# Altium PCB 6502.PcbDoc
Units mil, origin at the board's own origin, x right, y up, seen from the top; angles counter-clockwise.
Board outline 6000 x 4000 mil, 2 copper layers (Top Layer, Bottom Layer); 34 components, 103 nets, 376 pads, 10 vias.
Unrouted connection lines stored in the file: 1.
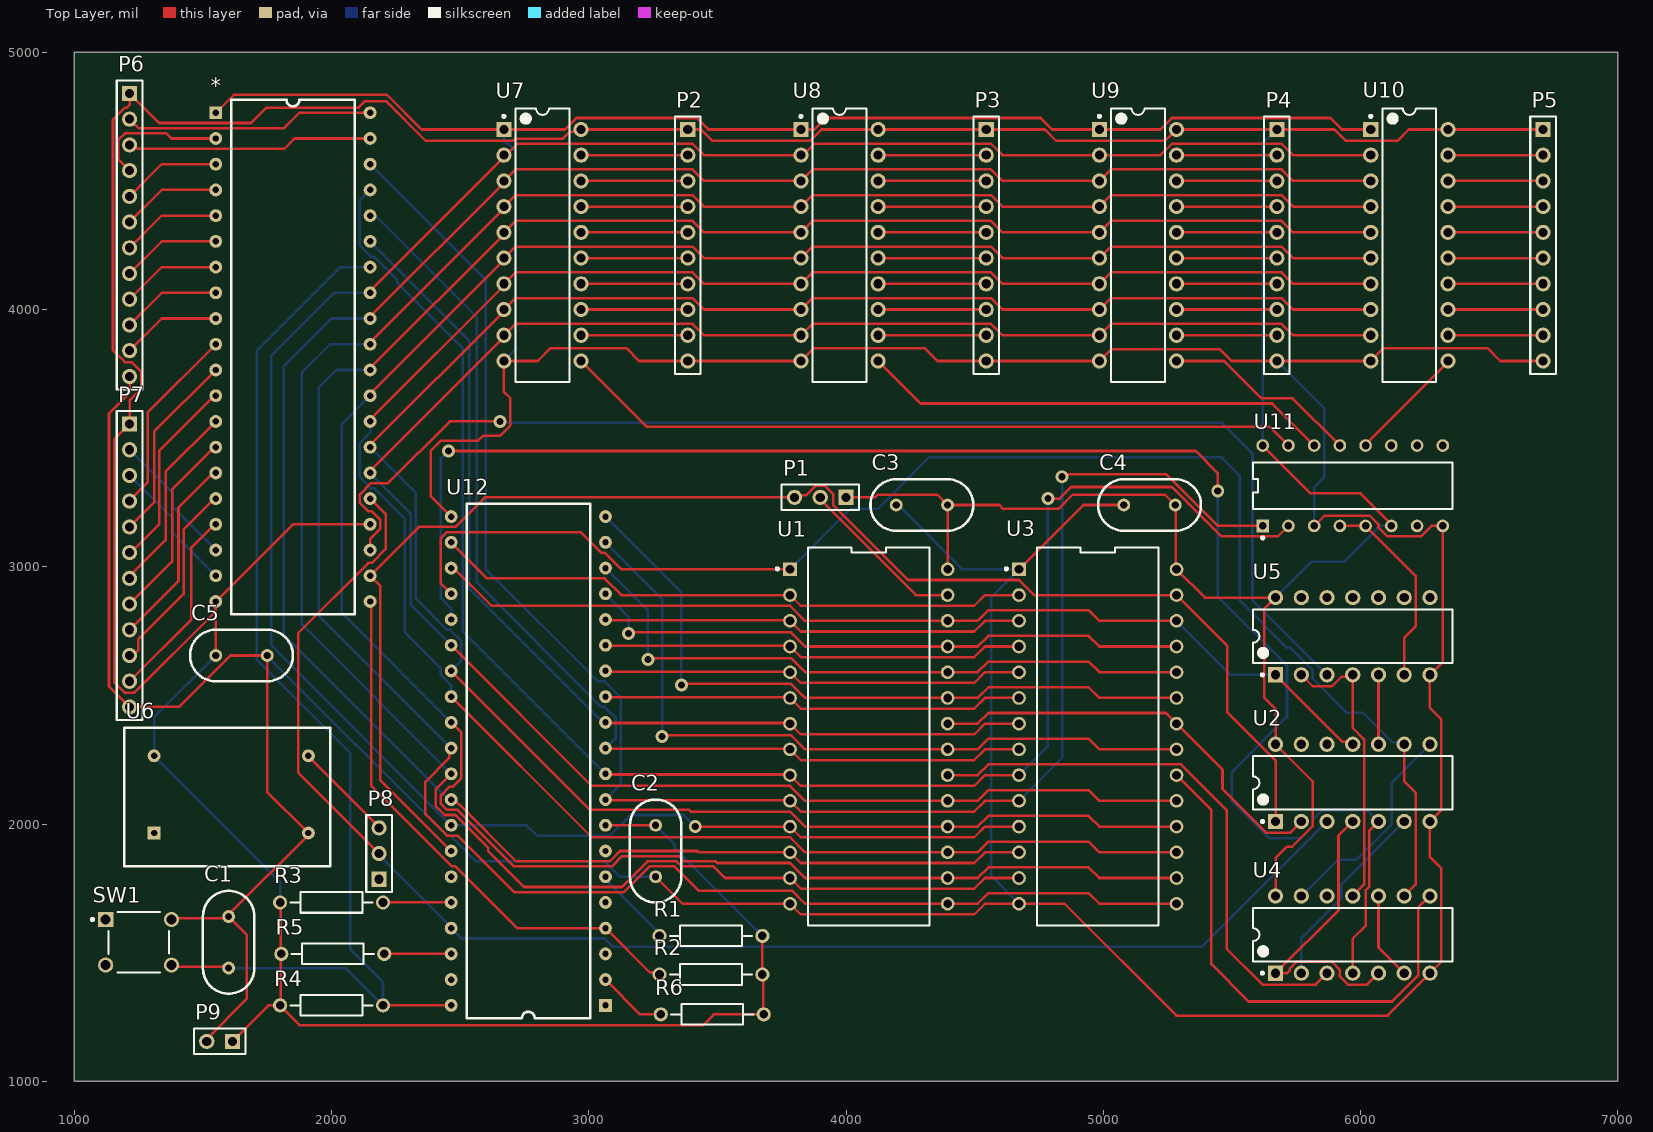
[diagram p0: Top Layer view]
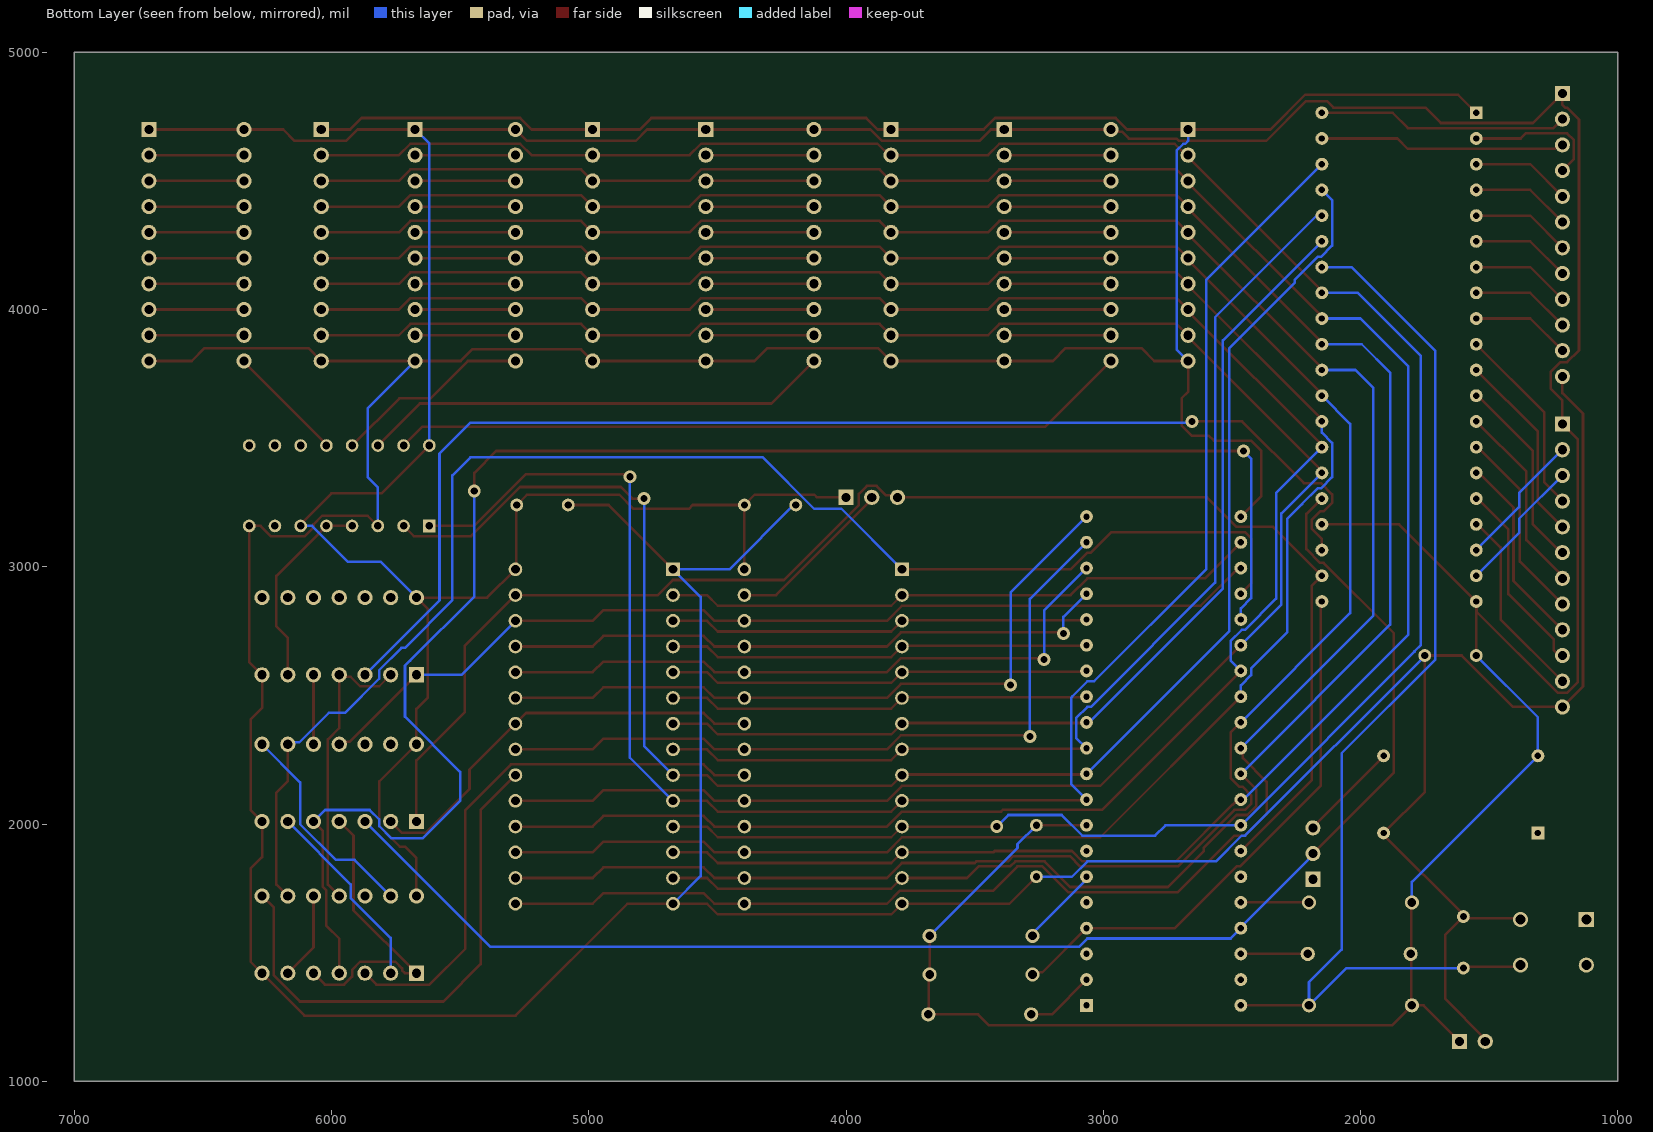
[diagram p1: Bottom Layer view, seen from below]

## Layer stack, top to bottom
Top Solder: solder mask 0.4, Solder Resist, Dk 3.5
Top Layer: signal copper 1.4
Dielectric 1: dielectric 12.6, FR-4, Dk 4.8
Bottom Layer: signal copper 1.4
Bottom Solder: solder mask 0.4, Solder Resist, Dk 3.5

## Board outline
1000,1000 7000,1000 7000,5000 1000,5000

## Design rules (kind name [scope] priority, off if disabled: settings)
Clearance [All] p1: gap=10 ignorepadtopadclearanceinfootprint=FALSE except(0: Arc-Hole Track-Hole SMDPad-Hole THPad-Hole Via-Hole Fill-Hole Poly-Hole Region-Hole Text-Hole)
PolygonConnect [All] p1: connectstyle=Relief reliefconductorwidth=10 reliefentries=4 polygonreliefangle="90 Angle" airgapwidth=10
RoutingVias [All] p1: holewidth=28 width=50 viastyle="Through Hole" minholewidth=28 minwidth=50 maxholewidth=28 maxwidth=50
SolderMaskExpansion [All] p1: expansion=4 istentingtop=FALSE
Width [All] p1: maxlimit=10 minlimit=10 preferedwidth=10
30 further rules are at their usual default settings.

## Classes and differential pairs
component class PIO: * C5 P2 P3 P4 P5 P6 P7 U7 U8 U9 U10 U11
component class BusSelect: U2 U4 U5
component class Main: C1 C2 C3 C4 P1 P8 P9 R1 R2 R3 R4 R5 R6 SW1 U1 U3 U6 U12

## Components (designator, comment, footprint, x,y, rotation, side; value= is the part's Value field where it differs from the comment)
* "W65C22" DIP40 1550,4765 r0 top
C1 "Cap" "Ceramic Capacitor" 1600,1440 r90 top value=100nF
C2 "Cap" "Ceramic Capacitor" 3260,1995 r270 top value=100nF
C3 "Cap" "Ceramic Capacitor" 4395,3240 r180 top value=100nF
C4 "Cap" "Ceramic Capacitor" 5280,3240 r180 top value=100nF
C5 "Cap" "Ceramic Capacitor" 1550,2655 r0 top value=100nF
P1 "Header 3" HDR1X3 4000,3270 r180 top
P2 "Header 10" HDR1X10 3385,4700 r270 top
P3 "Header 10" HDR1X10 4545,4700 r270 top
P4 "Header 10" HDR1X10 5675,4700 r270 top
P5 "Header 10" HDR1X10 6710,4700 r270 top
P6 "Header 12" HDR1X12 1215,4840 r270 top
P7 "Header 12" HDR1X12 1215,3555 r270 top
P8 "Header 3" HDR1X3 2185,1785 r90 top
P9 "Header 2" HDR1X2 1615,1155 r180 top
R1 "Res2" AXIAL-0.4 3475,1565 r0 top value=10K
R2 "Res2" AXIAL-0.4 3475,1415 r0 top value=10K
R3 "Res2" AXIAL-0.4 2000,1695 r180 top value=10K
R4 "Res2" AXIAL-0.4 2000,1295 r180 top value=10K
R5 "Res2" AXIAL-0.4 2005,1495 r180 top value=10K
R6 "Res2" AXIAL-0.4 3480,1260 r0 top value=10K
SW1 "1825910-6" TECO-1825910-6_V 1250,1540 r0 top
U1 "AT28C256-15PU" FP-28P6-MFG 4088.75,2340 r0 top
U2 "SN74HC04N" N0014A 5970,2160 r90 top
U3 "hm62256b" FP-28P6-MFG 4978.75,2340 r0 top
U4 "SN74HC32N" N0014A 5970,1570 r90 top
U5 "SN74HC32N" N0014A 5970,2730 r90 top
U6 "Quartz" Quartz 1310,1965 r90 top
U7 "CD74HC573E" N0020A 2820,4250 r0 top
U8 "CD74HC573E" N0020A 3975,4250 r0 top
U9 "CD74HC573E" N0020A 5135,4250 r0 top
U10 "CD74HC573E" N0020A 6190,4250 r0 top
U11 "CD74HC238E" FP-N0016A-MFG 5970,3315 r90 top
U12 "W65C02" DIP40 3065,1295 r180 top

## Footprints (in the part's own frame and the unit in brackets; to place one, negate y for a bottom-side part, rotate by r counter-clockwise, add the part's x,y. Pads: shape width x height; smd on the part's side, far side on the other; paste and mask are expansions set on the pad)
AXIAL-0.4 [mm] "Axial Device, Thru-Hole; 2 Leads; 0.4 in Pin Spacing"
  round 1.4 hole 0.85: 1(-5.08,0) 2(5.08,0)
  silkscreen extent -4.06,-1.02 4.06,1.02
"Ceramic Capacitor" [mil]
  round 50 hole 28: 1(0,0) 2(200,0)
  silkscreen extent -100,-100 300,100
DIP40 [mil]
  rect 50x50 hole 25: 1(0,0)
  round 50 hole 25: 2(0,-100) 3(0,-200) 4(0,-300) 5(0,-400) 6(0,-500) 7(0,-600) 8(0,-700) 9(0,-800) 10(0,-900) 11(0,-1000) 12(0,-1100) 13(0,-1200) 14(0,-1300) 15(0,-1400) 16(0,-1500) 17(0,-1600) 18(0,-1700) 19(0,-1800) 20(0,-1900) 21(600,-1900) 22(600,-1800) 23(600,-1700) 24(600,-1600) 25(600,-1500) 26(600,-1400) 27(600,-1300) 28(600,-1200) 29(600,-1100) 30(600,-1000) 31(600,-900) 32(600,-800) 33(600,-700) 34(600,-600) 35(600,-500) 36(600,-400) 37(600,-300) 38(600,-200) 39(600,-100) 40(600,0)
  silkscreen extent 60,-1950 540,50
FP-28P6-MFG [mm]
  rect 1.35x1.35 hole 0.85 paste-1000 mask+0: 1(-7.779,16.51)
  round 1.35 hole 0.85 paste-1000 mask+0: 2(-7.779,13.97) 3(-7.779,11.43) 4(-7.779,8.89) 5(-7.779,6.35) 6(-7.779,3.81) 7(-7.779,1.27) 8(-7.779,-1.27) 9(-7.779,-3.81) 10(-7.779,-6.35) 11(-7.779,-8.89) 12(-7.779,-11.43) 13(-7.779,-13.97) 14(-7.779,-16.51) 15(7.779,-16.51) 16(7.779,-13.97) 17(7.779,-11.43) 18(7.779,-8.89) 19(7.779,-6.35) 20(7.779,-3.81) 21(7.779,-1.27) 22(7.779,1.27) 23(7.779,3.81) 24(7.779,6.35) 25(7.779,8.89) 26(7.779,11.43) 27(7.779,13.97) 28(7.779,16.51)
  silkscreen extent -9.15,-18.67 5.98,18.67, body extent -8.55,-18.89 8.55,18.89, height 0.25
FP-N0016A-MFG [mm]
  rect 1.25x1.25 hole 0.75 paste-1000 mask+0: 1(-3.97,8.89)
  round 1.25 hole 0.75 paste-1000 mask+0: 2(-3.97,6.35) 3(-3.97,3.81) 4(-3.97,1.27) 5(-3.97,-1.27) 6(-3.97,-3.81) 7(-3.97,-6.35) 8(-3.97,-8.89) 9(3.97,-8.89) 10(3.97,-6.35) 11(3.97,-3.81) 12(3.97,-1.27) 13(3.97,1.27) 14(3.97,3.81) 15(3.97,6.35) 16(3.97,8.89)
  silkscreen extent -5.27,-9.84 2.3,9.84, body extent -4.69,-9.94 4.69,9.94, height 0.25
HDR1X2 [mm] "Connector; Header; 2 Position"
  rect 1.5x1.5 hole 0.9: 1(0,0)
  round 1.5 hole 0.9: 2(2.54,0)
  silkscreen extent -1.27,-1.27 3.81,1.27
HDR1X3 [mm] "Connector; Header; 3 Position"
  rect 1.5x1.5 hole 0.9: 1(0,0)
  round 1.5 hole 0.9: 2(2.54,0) 3(5.08,0)
  silkscreen extent -1.27,-1.27 6.35,1.27
HDR1X10 [mm] "Connector; Header; 10 Position"
  rect 1.5x1.5 hole 0.9: 1(0,0)
  round 1.5 hole 0.9: 2(2.54,0) 3(5.08,0) 4(7.62,0) 5(10.16,0) 6(12.7,0) 7(15.24,0) 8(17.78,0) 9(20.32,0) 10(22.86,0)
  silkscreen extent -1.27,-1.27 24.13,1.27
HDR1X12 [mm] "Connector; Header; 12 Position"
  rect 1.5x1.5 hole 0.9: 1(0,0)
  round 1.5 hole 0.9: 2(2.54,0) 3(5.08,0) 4(7.62,0) 5(10.16,0) 6(12.7,0) 7(15.24,0) 8(17.78,0) 9(20.32,0) 10(22.86,0) 11(25.4,0) 12(27.94,0)
  silkscreen extent -1.27,-1.27 29.21,1.27
N0014A [mm] "DIP, 14-Leads, Body 19.7x6.6mm, Pitch 2.54mm"
  rect 1.5x1.5 hole 0.9: 1(-3.81,7.62)
  round 1.5 hole 0.9: 2(-3.81,5.08) 3(-3.81,2.54) 4(-3.81,0) 5(-3.81,-2.54) 6(-3.81,-5.08) 7(-3.81,-7.62) 8(3.81,-7.62) 9(3.81,-5.08) 10(3.81,-2.54) 11(3.81,0) 12(3.81,2.54) 13(3.81,5.08) 14(3.81,7.62)
  silkscreen extent -3.93,-9.85 2.65,9.85, body extent -3.95,-9.85 3.95,9.85, height 5.08
N0020A [mm] "DIP, 20-Leads, Body 26.9x6.6mm, Pitch 2.54mm"
  rect 1.5x1.5 hole 0.9: 1(-3.81,11.43)
  round 1.5 hole 0.9: 2(-3.81,8.89) 3(-3.81,6.35) 4(-3.81,3.81) 5(-3.81,1.27) 6(-3.81,-1.27) 7(-3.81,-3.81) 8(-3.81,-6.35) 9(-3.81,-8.89) 10(-3.81,-11.43) 11(3.81,-11.43) 12(3.81,-8.89) 13(3.81,-6.35) 14(3.81,-3.81) 15(3.81,-1.27) 16(3.81,1.27) 17(3.81,3.81) 18(3.81,6.35) 19(3.81,8.89) 20(3.81,11.43)
  silkscreen extent -3.93,-13.5 2.65,13.5, body extent -3.95,-13.45 3.95,13.45, height 5.08
Quartz [mil]
  rect 50x50 hole 25: 1(0,0)
  round 50 hole 25: 7(0,-600) 8(300,-600) 14(300,0)
  silkscreen extent -130,-685 410,115
TECO-1825910-6_V [mm] "Switch, 4-Leads, Body 5.99x5.99mm"
  rect 1.5x1.5 hole 0.99: 1(-3.25,2.25)
  round 1.5 hole 0.99: 2(3.25,2.25) 3(-3.25,-2.25) 4(3.25,-2.25)
  silkscreen extent -4.67,-2.99 2.99,3, body extent -3,-2.99 2.99,3, height 5

## Part data
C1 C2 C3 C4 C5: "Capacitor", LatestRevisionDate=17-Jul-2002, LatestRevisionNote="Re-released for DXP Platform.", PackageDescription="Radial Cap, Thru-Hole; 2 Leads; 0.3 in Pin Spacing", PackageReference=RAD-0.3, Published=8-Jun-2000, Publisher="Altium Limited"
P1 P8: "Header, 3-Pin", LatestRevisionDate=17-Jul-2002, LatestRevisionNote="Re-released for DXP Platform.", Publisher="Altium Limited"
P2 P3 P4 P5: "Header, 10-Pin", LatestRevisionDate=17-Jul-2002, LatestRevisionNote="Re-released for DXP Platform.", Publisher="Altium Limited"
P6 P7: "Header, 12-Pin", LatestRevisionDate=17-Jul-2002, LatestRevisionNote="Re-released for DXP Platform.", Publisher="Altium Limited"
P9: "Header, 2-Pin", LatestRevisionDate=17-Jul-2002, LatestRevisionNote="Re-released for DXP Platform.", Publisher="Altium Limited"
R1 R2 R3 R4 R5 R6: "Resistor", LatestRevisionDate=17-Jul-2002, LatestRevisionNote="Re-released for DXP Platform.", PackageDescription="Axial Device, Thru-Hole; 2 Leads; 0.4 in Pin Spacing", PackageReference=AXIAL-0.4, Published=8-Jun-2000, Publisher="Altium Limited"
SW1: library part CMP-1684-00021-1, "Tact Switch, SPST-NO, 0.05 A, -35 to 85 degC, 4-Pin THD, RoHS, Bulk", Actuator Color=Black, Contact Rating @ Voltage=0.05A@24VDC, Dielectric Strength=500VAC, Manufacturer="TE Connectivity", Maximum AC Voltage Rating=N/A, Maximum Contact Resistance=100mOhm, Maximum DC Voltage Rating=24V, Minimum Insulation Resistance=100MOhm, Operating Temperature=-35to85C, Package Description="4-Pin Through Hole Device, Body 5.99 x 5.99 mm, Pitch 6.5 mm", Package Reference=THD, Actuator Length=1.4mm, Actuator Material=PolybutyleneTerephthalate, Actuator Style=RoundButton, Base Material=N/A, Body Orientation=Straight, Bushing Type=Unthreaded, Contact Material=CopperAlloy, Contact Plating=Silver, Datasheet URL=http://www.te.com/commerce/DocumentDelivery/DDEController?Action=showdoc&DocId=Customer+Drawing%7F1825910%7FC9%7Fpdf%7FEnglish%7FENG_CD_1825910_C9.pdf%7F1825910-6, Datasheet Version="Rev. C9", Dimension=5.99x5mm, Electrical Life=100000Cycles, Family=1825910, Function=MomentaryContact, Housing Material=N/A, Illumination=N/R, Manufacturer URL=http://www.te.com, Mechanical Life=100000Cycles, Mounting=ThroughHole, Packaging=N/A, Part No=1825910-6, Pole Throw Configuration=SPST, Product Weight=N/A, RoHS=Yes, Seal Description=N/A, Seal Location=N/A, Switch Configuration=OFF(ON), Terminal Type=PCPins, Thread Size=N/R
U1: library part CMP-06313-000003-1, "IC EEPROM 256K PARALLEL 28DIP", Manufacturer=Microchip, Max Supply Voltage=5.5V, Min Supply Voltage=4.5V, Nominal Supply Current=50mA, Package=28P6, Temperature="-40°C to +85°C", Temperature Range High=+85°C, Temperature Range Low=-40°C, Access Time=150ns, Automotive=No, Category=IC, ComponentLink2Description=Datasheet, ComponentLink2URL=http://ww1.microchip.com/downloads/en/DeviceDoc/doc0006.pdf, Device Class L1="Integrated Circuits (ICs)", Device Class L2=Memory, Device Class L3=EEPROM, Digikey Description="IC EEPROM 256K PARALLEL 28DIP", Height=4.826mm, Interface=Parallel, Ipc Land Pattern Name=DIP1556W46P254L3734H483Q28, Lead Free=Yes, Manufacturer Part Number=AT28C256-15PU, Memory Size=256Kbits, Memory Type=EEPROM, Octopart=https://octopart.com/at28c256-15pu-microchip-77758240, RoHS=TRUE, Standoff Height=0.381mm
U2: library part CMP-1615-00892-2, "Hex Inverters, N0014A, TUBE", F @ Nom Voltage(Max)(Mhz)=20, Generic Part Number=SN74HC04, ICC @ Nom Voltage(Max)(mA)=0.02, Manufacturer="Texas Instruments", Operating Temperature Range(C)="-40 to 85", Rating=Catalog, Voltage(Nom)(V)=5, Bits(#)=6, Code_JEDEC=MS-001, DatasheetVersion=SCLS078F, Input Type=CMOS, Output Drive (IOL/IOH)(Max)(mA)=-4/4, Output Type=CMOS, PackageReference=N0014A, Schmitt Trigger=No, Technology Family=HC, tpd @ Nom Voltage(Max)(ns)=20, VCC(Max)(V)=6, VCC(Min)(V)=2
U3: library part CMP-06313-000003-1, "RAM", Manufacturer=Microchip, Manufacturer Part Number=AT28C256-15PU, Max Supply Voltage=5.5V, Min Supply Voltage=4.5V, Nominal Supply Current=50mA, Package=28P6, Temperature="-40°C to +85°C", Temperature Range High=+85°C, Temperature Range Low=-40°C, Access Time=150ns, Automotive=No, Category=IC, ComponentLink2Description=Datasheet, ComponentLink2URL=http://ww1.microchip.com/downloads/en/DeviceDoc/doc0006.pdf, Device Class L1="Integrated Circuits (ICs)", Device Class L2=Memory, Device Class L3=EEPROM, Digikey Description="IC EEPROM 256K PARALLEL 28DIP", Height=4.826mm, Interface=Parallel, Ipc Land Pattern Name=DIP1556W46P254L3734H483Q28, Lead Free=Yes, Memory Size=256Kbits, Memory Type=EEPROM, Octopart=https://octopart.com/at28c256-15pu-microchip-77758240, RoHS=TRUE, Standoff Height=0.381mm
U4 U5: library part CMP-1573-00148-3, "Quadruple 2-Input Positive-OR Gates, N0014A, TUBE", F @ Nom Voltage(Max)(Mhz)=70, Generic Part Number=SN74HC32, ICC @ Nom Voltage(Max)(mA)=0.02, Manufacturer="Texas Instruments", Operating Temperature Range(C)="-40 to 85", Rating=Catalog, tpd @ Nom Voltage(Max)(ns)=25, Voltage(Nom)(V)=5, Bits(#)=4, Code_JEDEC=MS-001, DatasheetVersion=SCLS200D, Input Type=CMOS, Output Drive (IOL/IOH)(Max)(mA)=5.2/-5.2, Output Type=CMOS, PackageReference=N0014A, PackageVersion=http://www.ti.com/lit/ml/mpdi002c/mpdi002c.pdf, VCC(Max)(V)=6, VCC(Min)(V)=2
U7 U8 U9 U10: library part CMP-1621-00360-2, "High Speed CMOS Logic Octal Transparent Latches with 3-State Outputs, N0020A, TUBE", F @ Nom Voltage(Max)(Mhz)=28, Generic Part Number=CD74HC573, ICC @ Nom Voltage(Max)(mA)=0.08, Manufacturer="Texas Instruments", Operating Temperature Range(C)="-55 to 125", Rating=Catalog, tpd @ Nom Voltage(Max)(ns)=37, Voltage(Nom)(V)=6, 3-State Output=Yes, Bits(#)=8, Code_JEDEC=MS-001, DatasheetVersion=SCLS454A, Input Type=CMOS, Output Drive (IOL/IOH)(Max)(mA)=7.8/-7.8, Output Logic=Inverted, Output Type=CMOS, PackageReference=N0020A, Schmitt Trigger=No, Technology Family=HC, VCC(Max)(V)=6, VCC(Min)(V)=2
U11: library part CMP-1633-00674-3, "IC DECODER/DEMUX 1X3:8 16DIP", Case/Package=PDIP, High Level Output Current=-5.2mA, Low Level Output Current=5.2mA, Max Operating Temperature=125°C, Max Supply Voltage=6V, Min Operating Temperature=-55°C, Min Supply Voltage=2V, Package Quantity=25, Quiescent Current=8uA, Bandwidth=28MHz, Contact Plating=Gold, Independent Circuits=1, Lead Free="Lead Free", Logic Function=Demultiplexer, Mount="Through Hole", Number of Bits=8, Number of Channels=1, Number of Elements=1, Number of Input Lines=3, Number of Inputs=3, Number of Output Lines=8, Number of Outputs=8, Number of Pins=16, Packaging=Rail/Tube, Polarity=Non-Inverting, Propagation Delay=13ns, Radiation Hardening=No, REACH SVHC="No SVHC", RoHS Compliant=Yes, Supply Type=Single, Turn-On Delay Time=265ns, Weight=0.03357oz

## Via types
v1: diameter 50, hole 28, Top Layer to Bottom Layer, 10 vias

## Nets (pads, with @x,y where several pads share a name; then routed paths per layer and width w, separated by ;. In a path a pad name is that pad's centre, name@x,y a point inside that pad or via, vN(x,y) a via of type N, cw(c..) or ccw(c..) an arc to the next point about the centre after c; other vN are vias at no path point)
A0: *.38 U1.10 U3.10 U11.1 U12.9 | length 6755.2
  Top Layer w10: U12.9 3067.5,2092.5 3780,2092.5 U1.10 3824.07,2048.43 4498.51,2048.43 4540.09,2090 U3.10 ; v1(4840,3350) 4847.65,3357.65 4863.51,3357.65 4865.86,3360 5244.85,3360 5446.15,3158.7 U11.1
  Bottom Layer w10: *.38 2600,4115 2600,2990 3035,2555 3061.57,2555 3120,2496.57 3120,2495 3125,2490 3125,2155 U12.9 ; U3.10 4840,2257.5 v1(4840,3350)
A1: *.37 U1.9 U3.9 U11.2 U12.10 | length 6504.6
  Top Layer w10: U12.10 3067.5,2192.5 3780,2192.5 U1.9 3824.07,2148.43 4498.51,2148.43 4540.09,2190 U3.9 ; v1(4785,3265) 4830,3265 4875,3310 5266.57,3310 5457.47,3119.09 5680.39,3119.09 U11.2
  Bottom Layer w10: *.37 2110,4425 2110,4248.43 2153.43,4205 2166.57,4205 2255,4116.57 2255,4105 2510,3850 2510,2750 U12.10 ; U3.9 4785,2302.5 v1(4785,3265)
A2: *.36 U1.8 U3.8 U12.11 | length 4145.6
  Top Layer w10: U12.11 3067.5,2292.5 3780,2292.5 U1.8 3824.07,2248.43 4498.51,2248.43 4540.09,2290 U3.8
  Bottom Layer w10: *.36 2170,4365 2565,3970 2565,2938.43 3048.43,2455 3061.57,2455 3105,2411.57 3105,2335 U12.11
A3: *.35 U1.7 U3.7 U12.12 | length 3898.9
  Top Layer w10: U12.12 3067.5,2392.5 3780,2392.5 U1.7 3824.07,2348.43 4498.51,2348.43 4540.09,2390 U3.7
  Bottom Layer w10: *.35 2535,3880 2535,2915 3055,2395 U12.12
A4: U1.6 U3.6 U12.13 | length 1644
  Top Layer w10: U12.13 3067.5,2492.5 3780,2492.5 U1.6 3824.07,2448.43 4498.51,2448.43 4540.09,2490 U3.6
A5: U1.5 U3.5 U12.14 | length 1644
  Top Layer w10: U12.14 3067.5,2592.5 3780,2592.5 U1.5 3824.07,2548.43 4498.51,2548.43 4540.09,2590 U3.5
A6: U1.4 U3.4 U12.15 | length 1644
  Top Layer w10: U12.15 3067.5,2692.5 3780,2692.5 U1.4 3824.07,2648.43 4498.51,2648.43 4540.09,2690 U3.4
A7: U1.3 U3.3 U12.16 | length 1644
  Top Layer w10: U12.16 3067.5,2792.5 3780,2792.5 U1.3 3824.07,2748.43 4498.51,2748.43 4540.09,2790 U3.3
A8: U1.25 U3.25 U12.17 | length 2381.6
  Top Layer w10: v1(3155,2740) 3160,2745 3786.3,2745 3841.3,2690 U1.25 4511.8,2690 4553.38,2731.57 4943.51,2731.57 4985.09,2690 U3.25
  Bottom Layer w10: U12.17 3155,2805 v1(3155,2740)
A9: U1.24 U3.24 U12.18 | length 2537.6
  Top Layer w10: v1(3230,2640) 3235,2645 3786.3,2645 3841.3,2590 U1.24 4511.8,2590 4553.38,2631.57 4943.51,2631.57 4985.09,2590 U3.24
  Bottom Layer w10: U12.18 3230,2830 v1(3230,2640)
A10: U1.21 U3.21 U12.19 | length 2905.4
  Top Layer w10: v1(3285,2340) 3290,2345 3786.3,2345 3841.3,2290 U1.21 4511.8,2290 4553.38,2331.57 4943.51,2331.57 4985.09,2290 U3.21
  Bottom Layer w10: U12.19 3285,2875 v1(3285,2340)
A11: U1.23 U3.23 U12.20 | length 2771.5
  Top Layer w10: v1@3350,2540 v1(3360,2540) 3365,2545 3786.3,2545 3841.3,2490 U1.23 4511.8,2490 4553.38,2531.57 4943.51,2531.57 4985.09,2490 U3.23
  Bottom Layer w10: U12.20 3360,2900 v1(3360,2540)
A12: U1.2 U3.2 U12.22 | length 2326.9
  Top Layer w10: U12.22 2605,2955 3061.57,2955 3126.57,2890 U1.2 3824.07,2848.43 4498.51,2848.43 4540.09,2890 U3.2
A13: U1.26 U2.11 U3.26 U5.1 U12.23 | length 3823.2
  Top Layer w10: U12.23 2475,2995 2621.57,2848.43 3782.87,2848.43 3841.3,2790 U1.26 4511.8,2790 4553.38,2831.57 4943.51,2831.57 4985.09,2790 U3.26 ; U5.1 5930.61,2319.39 5960.61,2319.39 U2.11
  Bottom Layer w10: U3.26 5495,2580 U5.1
A14: U1.1 U2.9 U4.9 U12.24 | length 5620.2
  Top Layer w10: U12.24 2425,2935 2425,3111.57 2448.43,3135 2968.43,3135 3048.43,3055 3061.57,3055 3126.57,2990 U1.1 ; U4.9 6214.53,1764.53 6214.53,2121.88 6170,2166.4 U2.9
  Bottom Layer w10: U1.1 4017.97,3225.47 4123.9,3225.47 4323.43,3425 5460,3425 5530,3355 5530,2870 5715.15,2684.85 5728.12,2684.85 5814.53,2598.44 5814.53,2565.47 5947.81,2432.19 6010.78,2432.19 6125.47,2317.5 6162.5,2317.5 U2.9
A15: U2.5 U4.4 U12.25 | length 6536
  Top Layer w10: v1(2455,3450) 5360,3450 5445,3365 v1(5445,3295) ; U4.4 5970,1554.14 6020,1604.14 6020,1741.72 6034.53,1756.24 6034.53,1974.53 U2.5
  Bottom Layer w10: v1(2455,3450) 2425,3420 2425,2878.43 2465,2838.43 U12.25 ; v1(5445,3295) 5445,2885 5695,2635 5695.27,2635 5714.53,2615.74 5714.53,2417.5 5500,2202.97 5500,2090 5645,1945 5767.97,1945 5814.53,1991.56 5814.53,2017.5 5851.56,2054.53 6025.47,2054.53 U2.5 U2.5@6062.5,2002.5
BE: R3.1 U12.36 | length 265
  Top Layer w10: R3.1 U12.36
C\L\K\: U2.4 U4.1 U4.5 | length 1207.6
  Top Layer w10: U2.4 5914.53,1954.53 5914.53,1664.53 U4.1 5714.53,1420 5725.47,1430.94 5725.47,1438.44 5751.56,1464.53 5888.44,1464.53 5920,1432.97 5920,1407.03 5951.56,1375.47 6025.47,1375.47 U4.5
CLK: *.25 P8.2 U2.3 U12.37 | length 5726.8
  Top Layer w10: *.25 2210,3205 2210,3068.43 2156.57,3015 2143.43,3015 1870,2741.57 1870,2200 P8.2
  Bottom Layer w10: P8.2 2185,1880 2465,1600 U12.37 2505.11,1554.89 3061.67,1554.89 3094.13,1522.44 5382.44,1522.44 U2.3
D0: *.33 U1.11 U3.11 U7.2 U8.2 U9.2 U10.2 U12.33 | length 9142.8
  Top Layer w10: *.33 2150,4072.5 2670,4592.5 U7.2 2678.55,4600 2723.08,4644.53 3403.44,4644.53 3447.97,4600 3833.55,4600 3878.08,4644.53 4563.44,4644.53 4607.97,4600 U9.2 5222.03,4600 5266.56,4644.53 5693.44,4644.53 5737.97,4600 U10.2 ; v1(3413.7,1990) U1.11 3824.07,1948.43 4498.51,1948.43 4540.09,1990 U3.11
  Bottom Layer w10: *.33 2010,4065 1765,3820 1765,2696.57 1790,2671.57 1790,2670 U12.33 2758.7,1995 2798.7,1955 3081.57,1955 3161.57,2035 3368.7,2035 v1(3413.7,1990)
D1: *.32 U1.12 U3.12 U7.3 U8.3 U9.3 U10.3 U12.32 | length 8962.8
  Top Layer w10: *.32 2150,3972.5 2670,4492.5 U7.3 2714.53,4544.53 3403.44,4544.53 3447.97,4500 U8.3 3869.53,4544.53 4563.44,4544.53 4607.97,4500 U9.3 5029.53,4544.53 5693.44,4544.53 5737.97,4500 U10.3 ; U12.32 2475.82,2095 2495.82,2075 2498.14,2075 2718.14,1855 3081.57,1855 3121.57,1895 3422.13,1895 3427.13,1890 U1.12 3824.07,1848.43 4498.51,1848.43 4540.09,1890 U3.12
  Bottom Layer w10: *.32 2000,3965 1815,3780 1815,2735 2455,2095 U12.32
D2: *.31 U1.13 U3.13 U7.4 U8.4 U9.4 U10.4 U12.31 | length 9000.1
  Top Layer w10: *.31 2150,3872.5 2670,4392.5 U7.4 2714.53,4444.53 3403.44,4444.53 3447.97,4400 U8.4 3869.53,4444.53 4563.44,4444.53 4607.97,4400 U9.4 5029.53,4444.53 5693.44,4444.53 5737.97,4400 U10.4 ; U12.31 2405,2135 2405,2070.15 2440.15,2035 2481.57,2035 2608.43,1908.14 2608.43,1895 2748.43,1755 3128.45,1755 3228.45,1855 3341.6,1855 3361.6,1835 3484.63,1835 3529.63,1790 U1.13 3824.07,1748.43 4498.51,1748.43 4540.09,1790 U3.13
  Bottom Layer w10: *.31 1995,3865 1885,3755 1885,2775 U12.31
D3: *.30 U1.15 U3.15 U7.5 U8.5 U9.5 U10.5 U12.30 | length 9553
  Top Layer w10: *.30 2150,3772.5 2670,4292.5 U7.5 2714.53,4344.53 3403.44,4344.53 3447.97,4300 U8.5 3869.53,4344.53 4563.44,4344.53 4607.97,4300 U9.5 5029.53,4344.53 5693.44,4344.53 5737.97,4300 U10.5 ; U12.30 2457.35,2287.35 2457.35,2256.52 2365,2164.18 2365,2038.43 2448.43,1955 2490,1955 2710,1735 3136.73,1735 3236.73,1835 3333.32,1835 3428.32,1740 3791.3,1740 3841.3,1690 U1.15 4511.8,1690 4553.38,1731.57 4943.51,1731.57 4985.09,1690 U3.15
  Bottom Layer w10: *.30 2020,3765 1950,3695 1950,2810 U12.30
D4: *.29 U1.16 U3.16 U7.6 U8.6 U9.6 U10.6 U12.29 | length 9143.7
  Top Layer w10: *.29 2150,3672.5 2670,4192.5 U7.6 2714.53,4244.53 3403.44,4244.53 3447.97,4200 U8.6 3869.53,4244.53 4563.44,4244.53 4607.97,4200 U9.6 5029.53,4244.53 5693.44,4244.53 5737.97,4200 U10.6 ; U12.29 2505,2355 2505,2178.43 2471.57,2145 2458.43,2145 2425,2111.57 2425,2078.43 2448.43,2055 2489.85,2055 2709.85,1835 3089.85,1835 3129.85,1875 3349.89,1875 3369.89,1855 3492.91,1855 3499.49,1848.43 3782.87,1848.43 3841.3,1790 U1.16 4511.8,1790 4553.38,1831.57 4943.51,1831.57 4985.09,1790 U3.16
  Bottom Layer w10: *.29 2040,3555 2040,2820 U12.29
D5: *.28 U1.17 U3.17 U7.7 U8.7 U9.7 U10.7 U12.28 | length 8577.4
  Top Layer w10: *.28 2150,3572.5 2670,4092.5 U7.7 2714.53,4144.53 3403.44,4144.53 3447.97,4100 U8.7 3869.53,4144.53 4563.44,4144.53 4607.97,4100 U9.7 5029.53,4144.53 5693.44,4144.53 5737.97,4100 U10.7 ; U12.28 3011.57,1948.43 3782.87,1948.43 3841.3,1890 U1.17 4511.8,1890 4553.38,1931.57 4943.51,1931.57 4985.09,1890 U3.17
  Bottom Layer w10: *.28 2150,3521.57 2110,3481.57 2110,3348.43 2153.43,3305 2166.57,3305 2226.65,3244.92 2226.65,3243.35 2285,3185 2285,2745 2425,2605 2425,2578.43 2465,2538.43 U12.28
D6: *.27 U1.18 U3.18 U7.8 U8.8 U9.8 U10.8 U12.27 | length 8377.4
  Top Layer w10: *.27 2150,3472.5 2670,3992.5 U7.8 2714.53,4044.53 3403.44,4044.53 3447.97,4000 U8.8 3869.53,4044.53 4563.44,4044.53 4607.97,4000 U9.8 5029.53,4044.53 5693.44,4044.53 5737.97,4000 U10.8 ; U12.27 3005,2055 3390.65,2055 3397.22,2048.43 3782.87,2048.43 3841.3,1990 U1.18 4511.8,1990 4553.38,2031.57 4943.51,2031.57 4985.09,1990 U3.18
  Bottom Layer w10: *.27 2327.5,3287.5 2327.5,2875.93 2448.43,2755 2461.57,2755 2505,2711.57 2505,2635 U12.27
D7: *.26 U1.19 U3.19 U7.9 U8.9 U9.9 U10.9 U12.26 | length 8136.6
  Top Layer w10: *.26 2150,3372.5 2670,3892.5 U7.9 2714.53,3944.53 3403.44,3944.53 3447.97,3900 U8.9 3869.53,3944.53 4563.44,3944.53 4607.97,3900 U9.9 5029.53,3944.53 5693.44,3944.53 5737.97,3900 U10.9 ; U12.26 3011.57,2148.43 3782.87,2148.43 3841.3,2090 U1.19 4511.8,2090 4553.38,2131.57 4943.51,2131.57 4985.09,2090 U3.19
  Bottom Layer w10: *.26 2307.5,3207.5 2307.5,2852.5 U12.26
GND: *.1 C1.2 C2.2 C3.2 C4.2 C5.2 P2.10 P3.10 P4.10 P5.10 P6.12 P7.12 P9.2 SW1.2 U1.14 U2.7 U3.1 U3.14 U4.7 U5.7 U6.7 U7.1 U7.10 U8.1 U8.10 U9.1 U9.10 U10.1 U10.10 U11.3 U11.8 U12.21 | length 25537.8
  Top Layer w10: P6.12 1215,3675.01 1135,3595.01 1135,2535 P7.12 1406.57,2455 1606.57,2655 C5.2 1750,2125 U6.7 1910,1957.5 1600,1647.5 C1.2 ; SW1.2 1383.66,1634.29 1594.29,1634.29 C1.2 ; P9.2 1515,1165 1670,1320 1670,1570 C1.2 ; *.1 1620,4835 2215,4835 2350,4700 U7.1 2907.03,4700 2951.56,4744.53 3420.74,4744.53 3465.27,4700 U8.1 3876.98,4700 3921.51,4744.53 4756.63,4744.53 4801.15,4700 U9.1 5222.03,4700 5266.56,4744.53 5882.87,4744.53 5927.4,4700 U10.1 ; U12.21 2385,3275 2385,3450 2425,3490 2570,3490 2590,3510 2656.57,3510 2695,3548.43 2695,3655.08 2670,3680.08 U7.10 2801.64,3800 2851.64,3850 3145.86,3850 3195.86,3800 P2.10 U8.10 3875,3850 4305.86,3850 4355.86,3800 P3.10 U9.10 5030,3845 5453.36,3845 5498.36,3800 P4.10 U10.10 6090,3850 6493.36,3850 6543.36,3800 P5.10 ; C2.2 3365,1690 U1.14 3824.07,1648.43 4498.51,1648.43 4540.09,1690 U3.14 4849.59,1690 5284.59,1255 6105,1255 U4.7 6314.53,1464.53 6314.53,1826.88 6270,1871.4 U2.7 6314.53,2054.53 6314.53,2406.88 6270,2451.4 U5.7 6320,2630 U11.8 6276.01,3158.7 6236.41,3119.09 6103.59,3119.09 6070,3152.69 6070,3164.71 6036.41,3198.31 5859.61,3198.31 U11.3 ; U3.1 4922.5,3240 C4.2
  Bottom Layer w10: C5.2 1750,2653.43 2448.43,1955 2461.57,1955 2561.57,1855 3061.57,1855 3121.57,1795 C2.2 ; U7.10 2714.53,3844.53 2714.53,4618.44 2688.44,4644.53 2680.94,4644.53 2670,4655.47 U7.1 ; C3.2 4203.8,3240 4453.8,2990 U3.1 4565,2882.5 4565,1797.5 U3.14 ; P4.10 5859.61,3615.39 5859.61,3348.31 5820,3308.71 U11.3
I\R\Q\: *.21 R2.1 U12.4 | length 2142.4
  Top Layer w10: *.21 2155,2860 2155,2148.43 2468.43,1835 2481.57,1835 2721.57,1595 U12.4 3236.37,1423.63 3266.37,1423.63 R2.1
N\M\I\: R1.1 U12.6 | length 317
  Bottom Layer w10: U12.6 3065,1785 3275,1575 R1.1
NetP1_2: P1.2 U1.27 | length 657.4
  Top Layer w10: P1.2 3900,3261.45 4271.45,2890 U1.27
NetP2_2: P2.2 U7.19 | length 415
  Top Layer w10: U7.19 P2.2
NetP2_3: P2.3 U7.18 | length 415
  Top Layer w10: U7.18 P2.3
NetP2_4: P2.4 U7.17 | length 415
  Top Layer w10: U7.17 P2.4
NetP2_5: P2.5 U7.16 | length 415
  Top Layer w10: U7.16 P2.5
NetP2_6: P2.6 U7.15 | length 415
  Top Layer w10: U7.15 P2.6
NetP2_7: P2.7 U7.14 | length 415
  Top Layer w10: U7.14 P2.7
NetP2_8: P2.8 U7.13 | length 415
  Top Layer w10: U7.13 P2.8
NetP2_9: P2.9 U7.12 | length 415
  Top Layer w10: U7.12 P2.9
NetP3_2: P3.2 U8.19 | length 420
  Top Layer w10: U8.19 P3.2
NetP3_3: P3.3 U8.18 | length 420
  Top Layer w10: U8.18 P3.3
NetP3_4: P3.4 U8.17 | length 420
  Top Layer w10: U8.17 P3.4
NetP3_5: P3.5 U8.16 | length 420
  Top Layer w10: U8.16 P3.5
NetP3_6: P3.6 U8.15 | length 420
  Top Layer w10: U8.15 P3.6
NetP3_7: P3.7 U8.14 | length 420
  Top Layer w10: U8.14 P3.7
NetP3_8: P3.8 U8.13 | length 420
  Top Layer w10: U8.13 P3.8
NetP3_9: P3.9 U8.12 | length 420
  Top Layer w10: U8.12 P3.9
NetP4_2: P4.2 U9.19 | length 390
  Top Layer w10: U9.19 P4.2
NetP4_3: P4.3 U9.18 | length 390
  Top Layer w10: U9.18 P4.3
NetP4_4: P4.4 U9.17 | length 390
  Top Layer w10: U9.17 P4.4
NetP4_5: P4.5 U9.16 | length 390
  Top Layer w10: U9.16 P4.5
NetP4_6: P4.6 U9.15 | length 390
  Top Layer w10: U9.15 P4.6
NetP4_7: P4.7 U9.14 | length 390
  Top Layer w10: U9.14 P4.7
NetP4_8: P4.8 U9.13 | length 390
  Top Layer w10: U9.13 P4.8
NetP4_9: P4.9 U9.12 | length 390
  Top Layer w10: U9.12 P4.9
NetP5_2: P5.2 U10.19 | length 370
  Top Layer w10: U10.19 P5.2
NetP5_3: P5.3 U10.18 | length 370
  Top Layer w10: U10.18 P5.3
NetP5_4: P5.4 U10.17 | length 370
  Top Layer w10: U10.17 P5.4
NetP5_5: P5.5 U10.16 | length 370
  Top Layer w10: U10.16 P5.5
NetP5_6: P5.6 U10.15 | length 370
  Top Layer w10: U10.15 P5.6
NetP5_7: P5.7 U10.14 | length 370
  Top Layer w10: U10.14 P5.7
NetP5_8: P5.8 U10.13 | length 370
  Top Layer w10: U10.13 P5.8
NetP5_9: P5.9 U10.12 | length 370
  Top Layer w10: U10.12 P5.9
NetP8_3: P8.3 U6.8 | length 393.9
  Top Layer w10: U6.8 1910,2262.5 2185,1987.5 P8.3
NetR5_1: R5.1 U12.38 | length 260
  Top Layer w10: R5.1 U12.38
NetR6_1: R6.1 U12.2 | length 270.9
  Top Layer w10: U12.2 3200,1260 R6.1
NetU2_6: U2.6 U4.2 | length 755.7
  Bottom Layer w10: U4.2 5770,1557.03 5925.47,1712.5 5925.47,1765.47 U2.6
NetU2_8: U2.8 U4.13 | length 839.9
  Bottom Layer w10: U4.13 5910.47,1860.47 5983.44,1860.47 6122.03,1999.06 6122.03,2162.03 U2.8
NetU2_10: U2.10 U5.5 | length 270
  Top Layer w10: U2.10 U5.5
NetU4_6: U4.6 U4.10 U4.12 | length 341.4
  Top Layer w10: U4.10 6070,1520 U4.6
NetU4_11: U4.11 U5.2 U5.4 | length 1133.8
  Top Layer w10: U5.2 5814.53,2535.47 5888.44,2535.47 5925.47,2572.5 5962.5,2572.5 U5.4 5970,2372.97 6014.53,2328.44 6014.53,1764.53 U4.11
PA_EN: U7.11 U11.15 | length 2886.2
  Top Layer w10: U7.11 3225,3545 5646.3,3545 U11.15
PB_EN: U8.11 U11.14 | length 1831.2
  Top Layer w10: U8.11 4290.29,3634.71 5656.59,3634.71 U11.14
PC_EN: U9.11 U11.13 | length 771.2
  Top Layer w10: U9.11 5470.08,3800 5615.37,3654.71 5736.59,3654.71 U11.13
PD_EN: U10.11 U11.12 | length 461.2
  Top Layer w10: U11.12 6020,3475.65 6340,3795.65 U10.11
PIO1C1: *.40 P6.2 | length 974.4
  Top Layer w10: P6.2 1250,4705 1815.45,4705 1875.45,4765 *.40
PIO1C2: *.39 P6.3 | length 957.8
  Top Layer w10: P6.3 1228.27,4640 1243.27,4625 1816.3,4625 1856.3,4665 *.39
PIO1D0: *.2 P6.4 | length 535.3
  Top Layer w10: P6.4 1170.47,4584.53 1170.47,4658.44 1196.56,4684.53 1358.1,4684.53 1377.63,4665 *.2
PIO1D1: *.3 P6.5 | length 386.8
  Top Layer w10: P6.5 1340,4565 *.3
PIO1D2: *.4 P6.6 | length 386.8
  Top Layer w10: P6.6 1340,4465 *.4
PIO1D3: *.5 P6.7 | length 386.8
  Top Layer w10: P6.7 1340,4365 *.5
PIO1D4: *.6 P6.8 | length 386.8
  Top Layer w10: P6.8 1340,4265 *.6
PIO1D5: *.7 P6.9 | length 386.8
  Top Layer w10: P6.9 1340,4165 *.7
PIO1D6: *.8 P6.10 | length 386.8
  Top Layer w10: P6.10 1340,4065 *.8
PIO1D7: *.9 P6.11 | length 386.8
  Top Layer w10: P6.11 1340,3965 *.9
PIO2C1: *.18 P7.2 | length 528.8
  Bottom Layer w10: P7.2 1383.37,3286.63 1383.37,3231.63 *.18
PIO2C2: *.19 P7.3 | length 528.8
  Bottom Layer w10: P7.3 1383.37,3186.63 1383.37,3131.63 *.19
PIO2D0: *.10 P7.4 | length 748.8
  Top Layer w10: P7.4 1215,3258.28 1285,3328.28 1285,3600 *.10
PIO2D1: *.11 P7.5 | length 748.8
  Top Layer w10: P7.5 1310,3250 1310,3525 *.11
PIO2D2: *.12 P7.6 | length 754.6
  Top Layer w10: P7.6 1220,3055 1330,3165 1330,3450 1545,3665 *.12
PIO2D3: *.13 P7.7 | length 748.8
  Top Layer w10: P7.7 1215,2963.28 1355,3103.28 1355,3370 *.13
PIO2D4: *.14 P7.8 | length 751.7
  Top Layer w10: P7.8 1380,3020 1380,3300 1545,3465 *.14
PIO2D5: *.15 P7.9 | length 754.6
  Top Layer w10: P7.9 1405,2945 1405,3230 1540,3365 *.15
PIO2D6: *.16 P7.10 | length 759.5
  Top Layer w10: P7.10 1228.27,2655 1248.27,2675 1248.27,2716.64 1425,2893.36 1425,3145 1545,3265 *.16
PIO2D7: *.17 P7.11 | length 751.7
  Top Layer w10: P7.11 1455,2795 1455,3075 1545,3165 *.17
PIO_C\E\: *.23 U5.3 | length 4904.4
  Top Layer w10: *.23 2150,3108.43 2190,3148.43 2190,3181.57 2156.57,3215 2143.43,3215 2110,3248.43 2110,3281.57 2153.43,3325 2220,3325 2460,3565 v1(2655,3565)
  Bottom Layer w10: v1@2641.75,3560 5460,3560 5580.39,3439.61 5580.39,2869.61 U5.3
PO_C\E\: U5.6 U11.4 U11.5 | length 777.7
  Top Layer w10: U11.4 U11.5 6214.53,2964.17 6214.53,2768.12 6170,2723.6 U5.6
R\S\T\: *.34 C1.1 R4.1 SW1.4 U12.40 | length 4474.4
  Top Layer w10: SW1.4 1383.66,1445.71 1594.29,1445.71 C1.1 ; R4.1 U12.40
  Bottom Layer w10: C1.1 2055,1440 R4.1 2200,1385 2073.43,1511.57 2073.43,2275 1710,2638.43 1710,3840 2035,4165 *.34
R\W: U1.22 U2.2 U3.22 | length 1650
  Top Layer w10: U1.22 4511.8,2390 4553.38,2431.57 5243.43,2431.57 U3.22 5463.76,2211.24 5463.76,2135.97 5634.26,1965.47 5725.47,1965.47 U2.2
  Bottom Layer w10: U3.22 U3.22@5286.57,2388.43
RAM_C\E\: U3.20 U4.8 | length 2024.9
  Top Layer w10: U3.20 5420,2055 5420,1455 5565,1310 6122.97,1310 6224.53,1411.56 6224.53,1674.53 U4.8
ROM_C\E\: U1.20 U4.3 | length 2180.9
  Top Layer w10: U1.20 4511.8,2190 4553.38,2231.57 5302.22,2231.57 5480,2053.8 5480,1515 5619.53,1375.47 5825.47,1375.47 U4.3
RW\: *.22 P1.3 U2.1 U3.27 U12.34 | length 5720.9
  Top Layer w10: U12.34 2190,2170 2190,2925 *.22 2340,3155 2481.57,3155 2596.57,3270 P1.3 3807.5,3277.5 3844.53,3277.5 3881.56,3314.53 3918.44,3314.53 3950,3282.97 3950,3239.73 4241.31,2948.43 4672.87,2948.43 4731.3,2890 U3.27 5481.63,2693.37 5481.63,2435.4 5670,2247.03 U2.1
VCC: *.20 *.24 C2.1 C3.1 C4.1 C5.1 P1.1 P2.1 P3.1 P4.1 P5.1 P6.1 P7.1 P9.1 R1.2 R2.2 R3.2 R4.2 R5.2 R6.2 U1.28 U2.14 U3.28 U4.14 U5.14 U6.14 U7.20 U8.20 U9.20 U10.20 U11.6 U11.16 U12.8 | length 20695.4
  Top Layer w10: C5.1 *.20 ; P9.1 1755,1295 R4.2 ; R3.2 1802.5,1692.5 1802.5,1497.5 R5.2 1802.5,1492.5 1802.5,1297.5 R4.2 ; *.24 1850,3165 *.20 ; U12.8 C2.1 ; R1.2 R2.2 3677.5,1412.5 3677.5,1262.5 R6.2 3486.36,1260 3443.8,1217.44 1877.56,1217.44 R4.2 ; P1.1 4113.05,3270 4123.05,3280 4355,3280 C3.1 4596.2,3240 4611.2,3225 4826.38,3225 4881.38,3280 5240,3280 C4.1 5282.5,3237.5 5282.5,2992.5 U3.28 5395,2880 U5.14 5625.47,2835.47 5625.47,2491.77 5670,2447.24 U2.14 5814.53,2165.47 5814.53,1991.56 5734.74,1911.77 5714.53,1911.77 5670,1867.24 U4.14 ; U1.28 C3.1@4395,3225 ; U11.16 5806.3,3285 6000,3285 6120,3165 U11.6 ; P5.1 U10.20 6187.76,4700 6143.23,4655.47 5943.64,4655.47 5899.11,4700 P4.1 U9.20 5240.47,4655.47 4817.4,4655.47 4772.87,4700 P3.1 U8.20 3905.27,4700 3860.74,4655.47 3481.51,4655.47 3436.98,4700 P2.1 U7.20 2960.61,4690.61 2925.93,4690.61 2899.84,4664.53 2714.8,4664.53 2705.74,4655.47 2366.24,4655.47 2211.72,4810 2130,4810 2105,4785 1747.5,4785 1687.5,4725 1330,4725 P6.1 1215,4795.47 1204.06,4784.53 1196.56,4784.53 1150.47,4738.44 1150.47,3841.56 1196.56,3795.47 1222.5,3795.47 1259.53,3758.44 1259.53,3691.25 1215,3646.72 P7.1 1155,3495 1155,2552.03 1197.03,2510 1232.97,2510 1547.97,2825 1547.97,2862.97 *.20
  Bottom Layer w10: C5.1 1310,2415 U6.14 1800,1775 R3.2 ; C2.1 3333.43,1921.57 3333.43,1906.57 R1.2 ; U11.16 5620,4645 P4.1 ; U5.14 5810.29,3020.29 5937.6,3020.29 6076.01,3158.7 U11.6
pads on no net: P8.1 SW1.1 SW1.3 U2.12 U2.13 U5.8 U5.9 U5.10 U5.11 U5.12 U5.13 U6.1 U11.7 U11.9 U11.10 U11.11 U12.1 U12.3 U12.5 U12.7 U12.35 U12.39